# Altium PCB BioTemp_pci.PcbDoc
Units mm, origin at the board's own origin, x right, y up, seen from the top; angles counter-clockwise.
Board outline 68.45 x 74.17 mm, 2 copper layers (Top Layer, Bottom Layer); 20 components, 19 nets, 90 pads, 4 vias.
Unrouted connection lines stored in the file: 11.
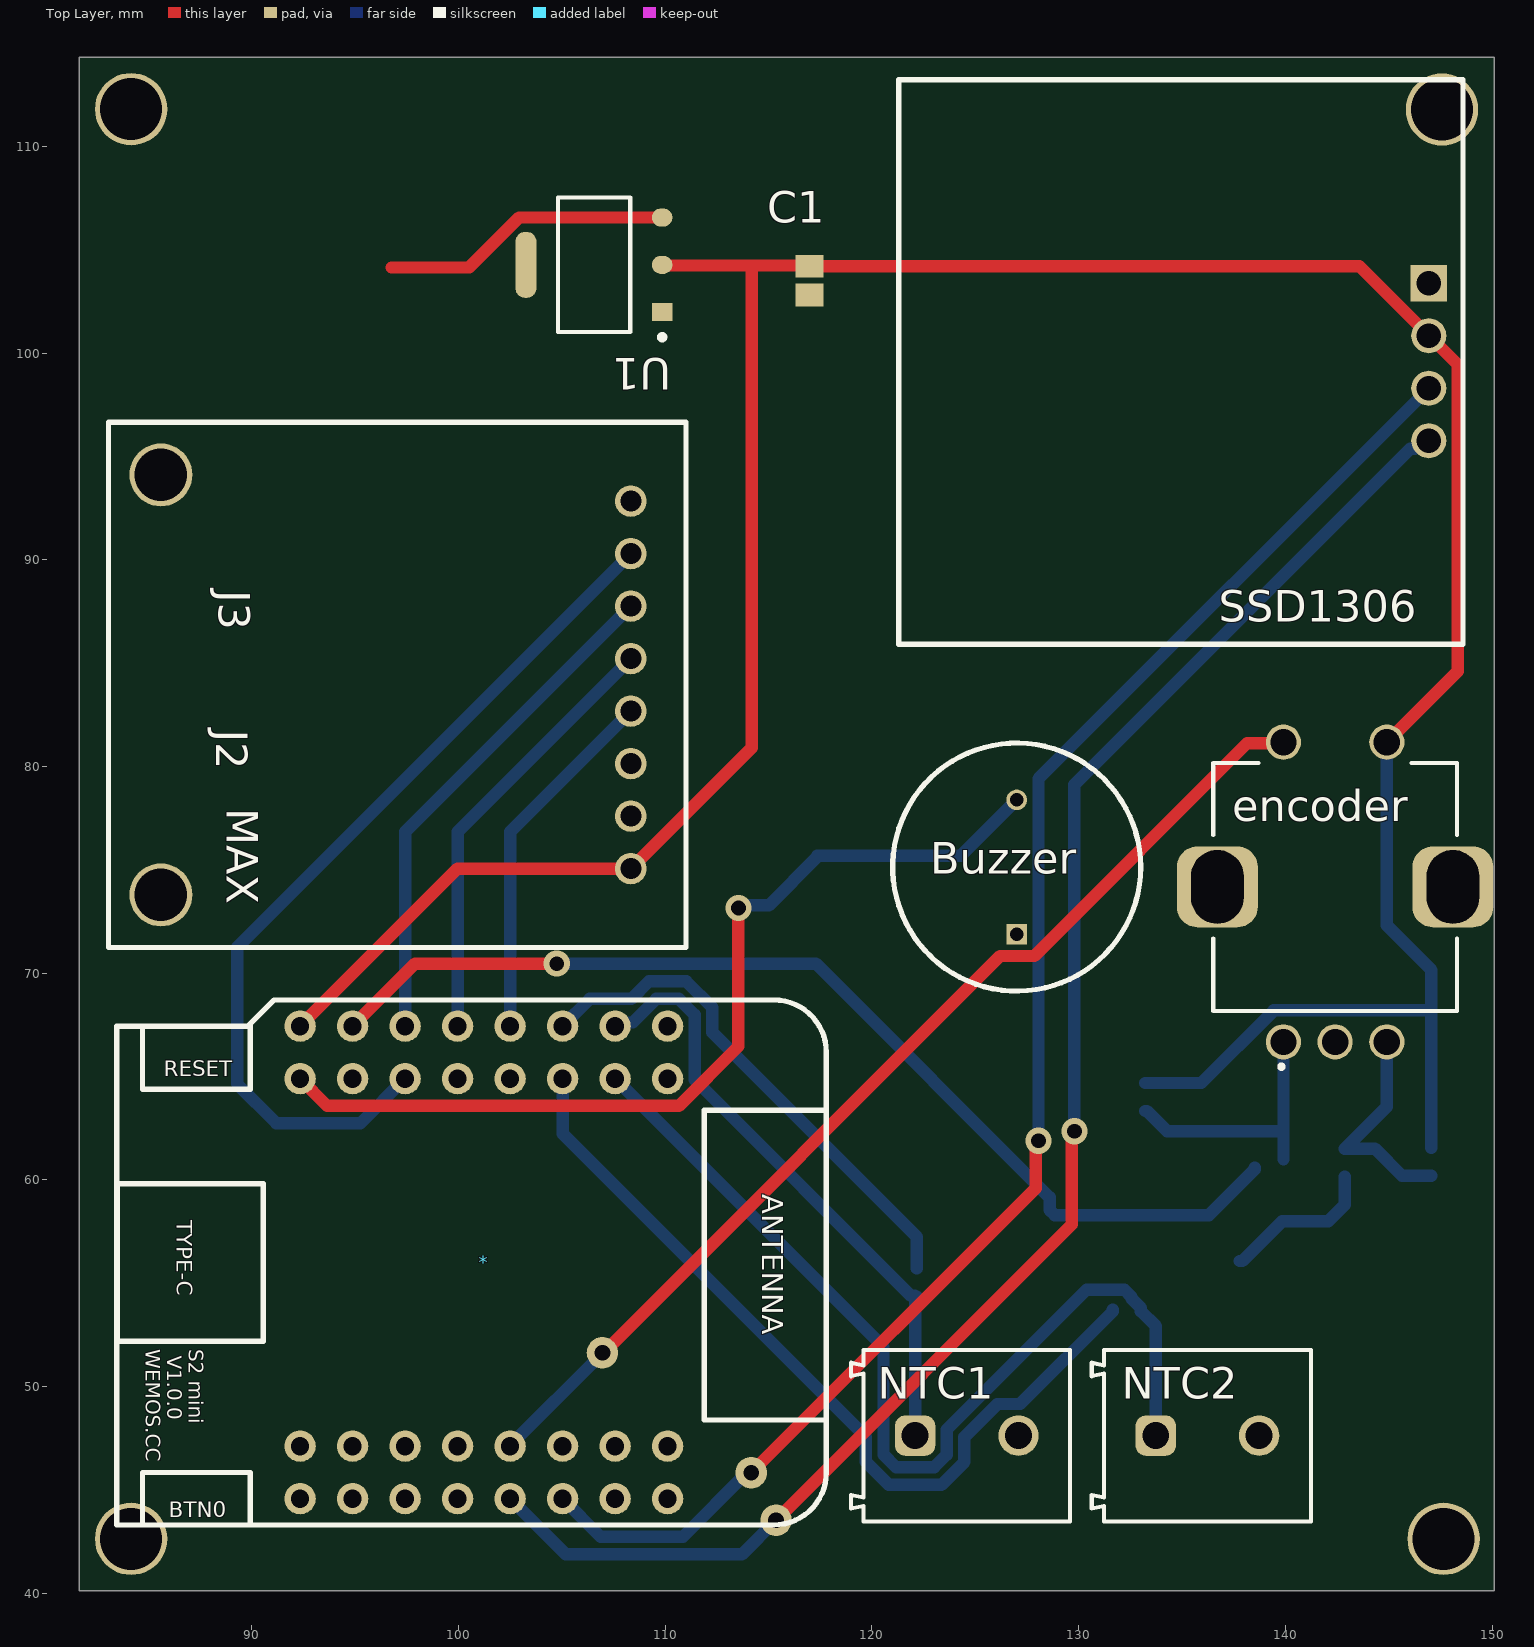
[diagram p0: Top Layer view]
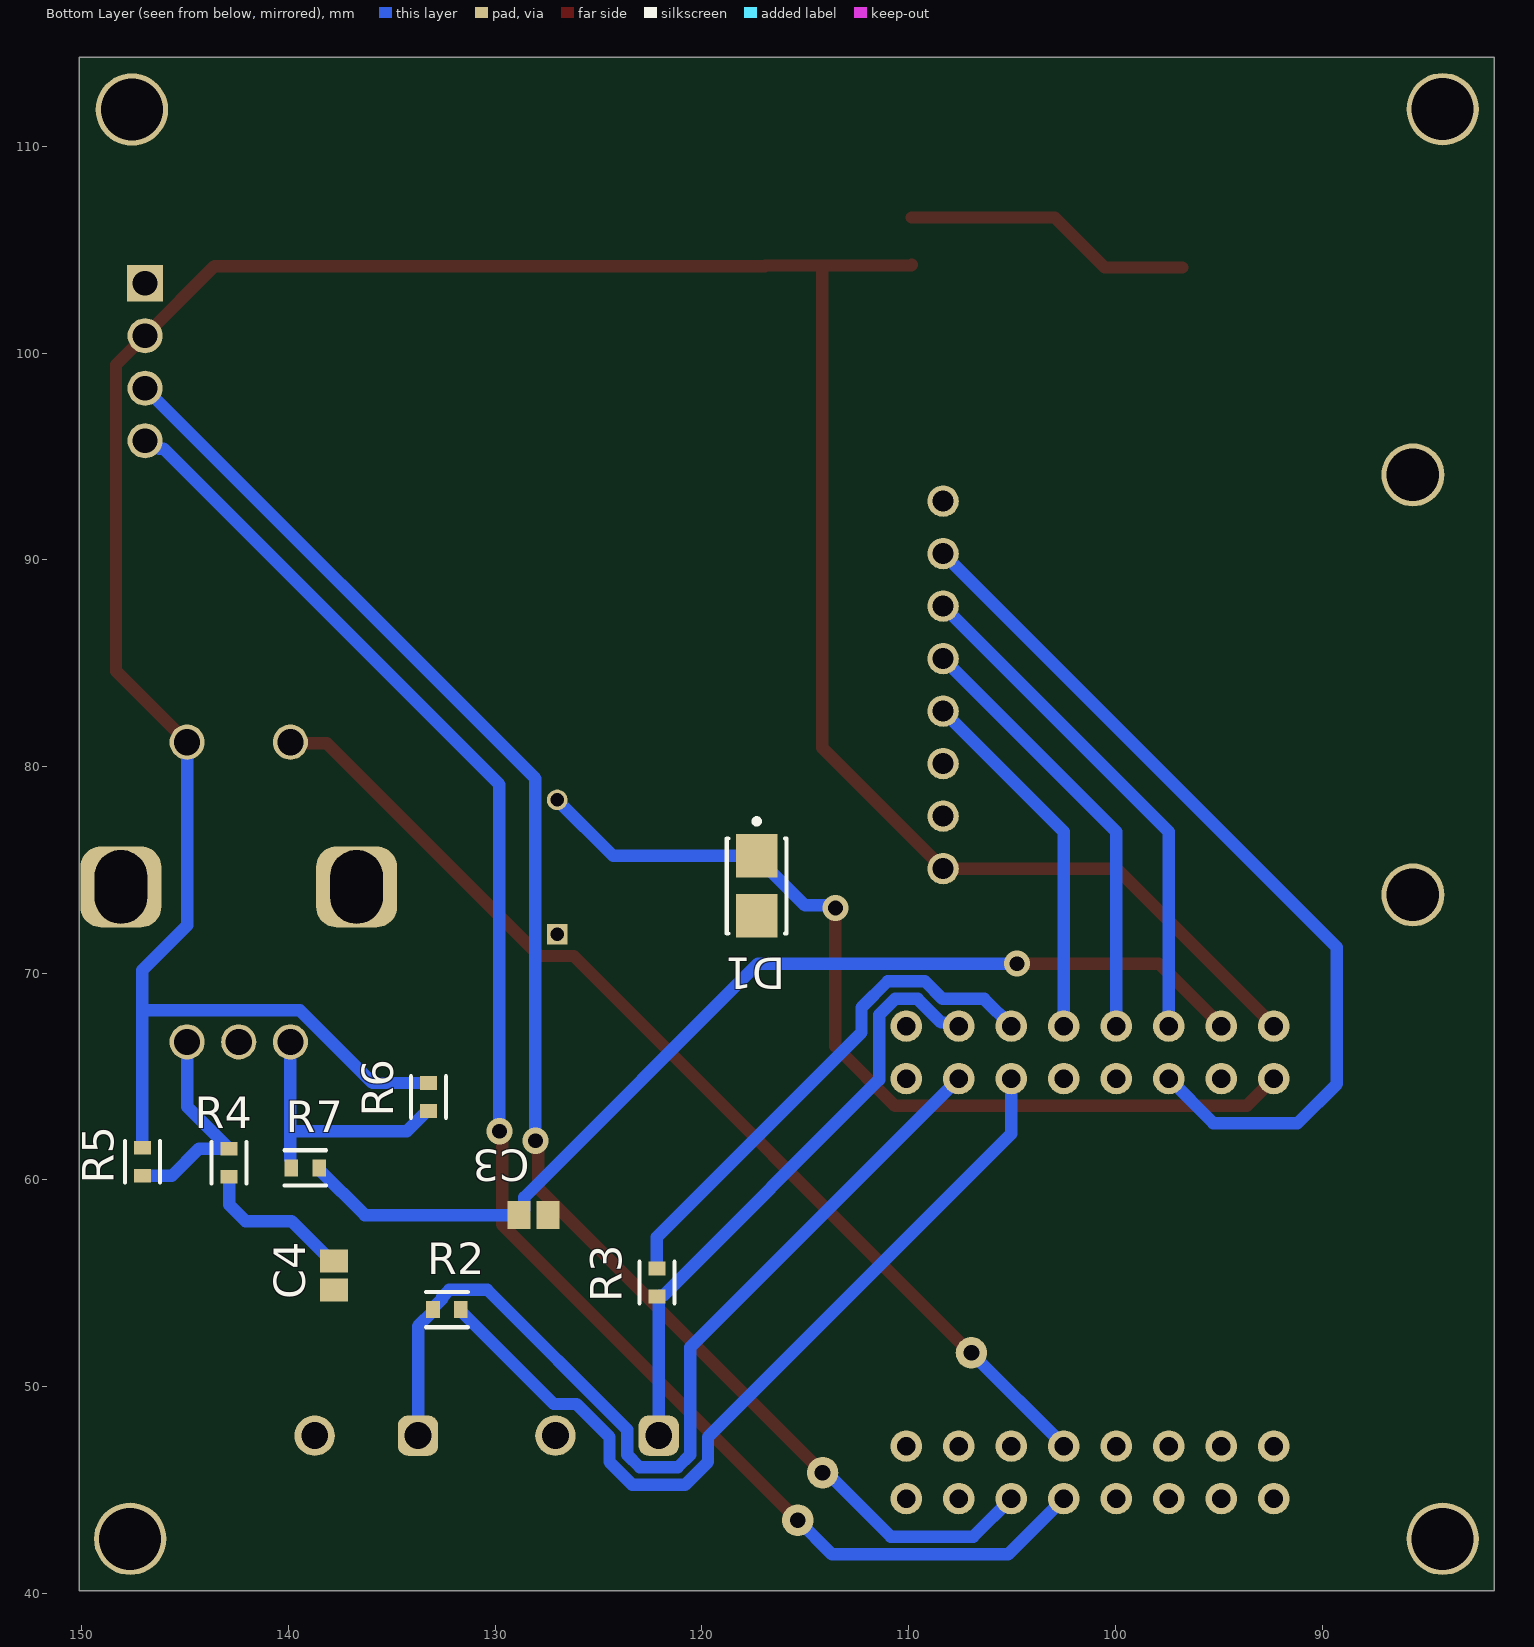
[diagram p1: Bottom Layer view, seen from below]
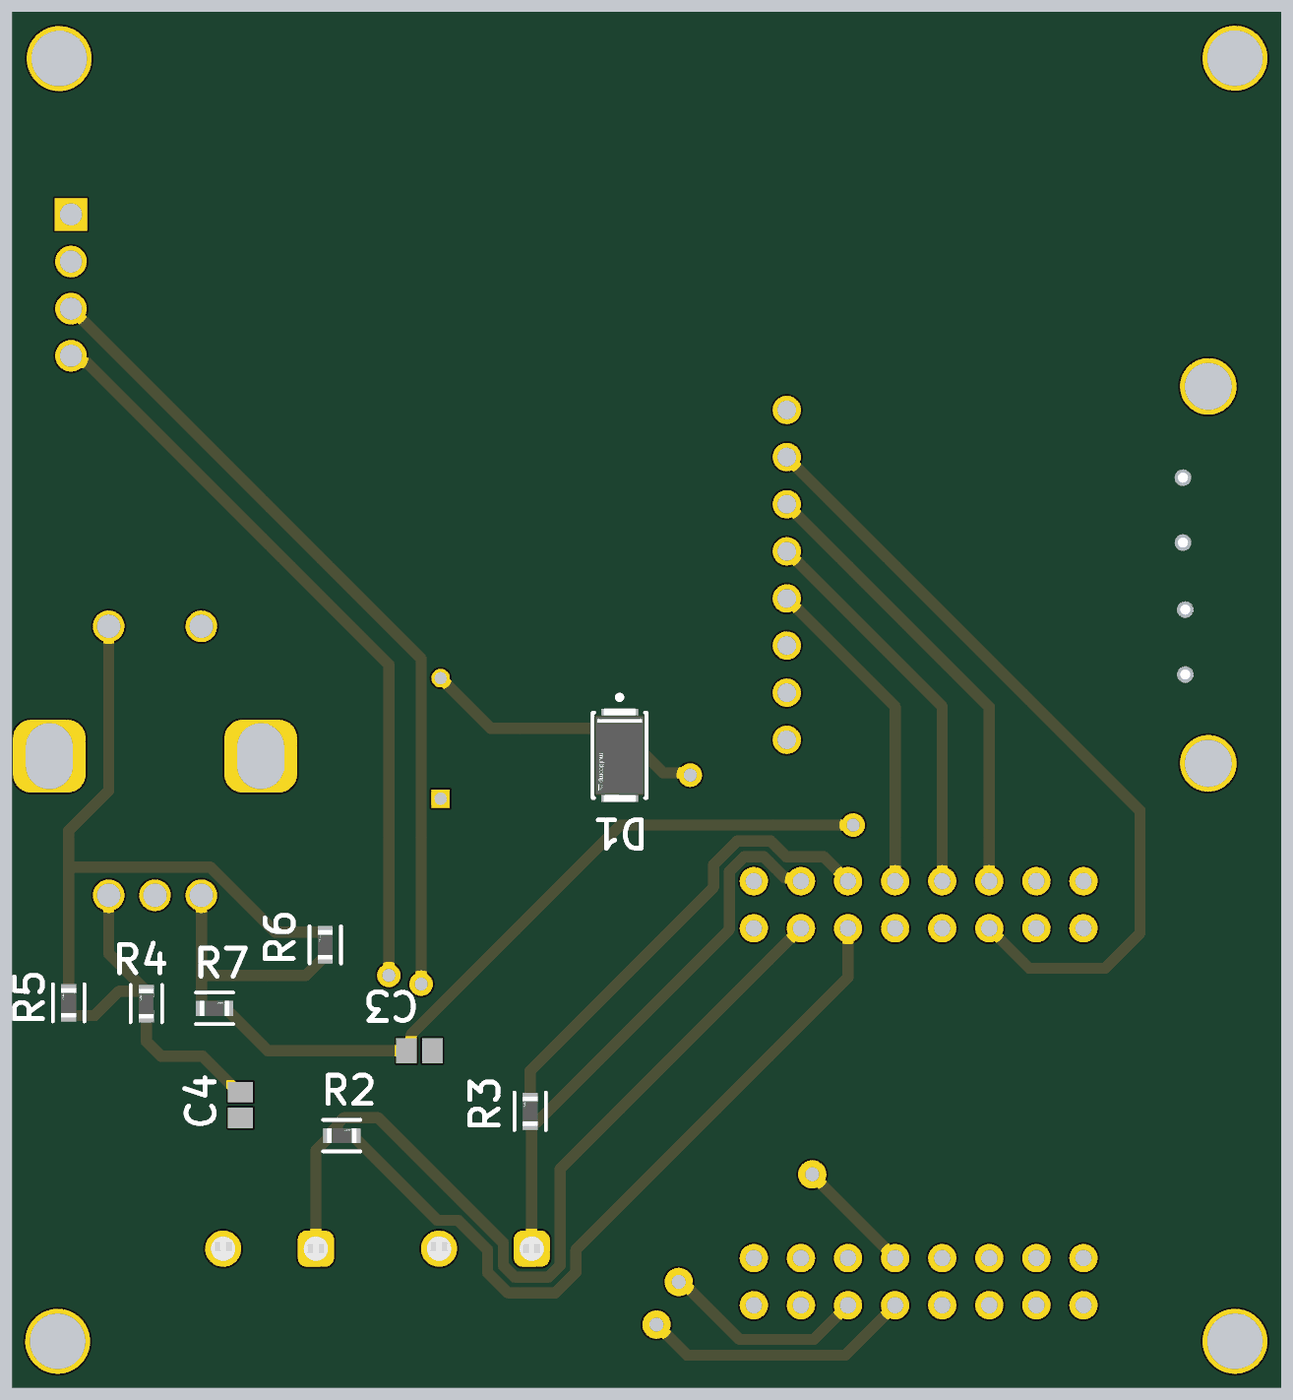
[diagram p2: 3D render of the assembled board from below, using the file's embedded part models]

## Layer stack, top to bottom
Top Solder: solder mask 0.0102, Solder Resist, Dk 3.5
Top Layer: signal copper 0.0356
Dielectric 1: dielectric 0.32, FR-4, Dk 4.8
Bottom Layer: signal copper 0.0356
Bottom Solder: solder mask 0.0102, Solder Resist, Dk 3.5

## Board outline
81.661,40.132 81.661,114.3 150.114,114.3 150.114,40.132

## Design rules (kind name [scope] priority, off if disabled: settings)
Clearance [All] p1: gap=0.254 ignorepadtopadclearanceinfootprint=FALSE except(0: Arc-Hole Track-Hole SMDPad-Hole THPad-Hole Via-Hole Fill-Hole Poly-Hole Region-Hole Text-Hole)
PolygonConnect [All] p1: connectstyle=Relief reliefconductorwidth=0.254 reliefentries=4 polygonreliefangle="90 Angle" airgapwidth=0.254
RoutingVias [All] p1: holewidth=0.711 width=1.27 viastyle="Through Hole" minholewidth=0.711 minwidth=1.27 maxholewidth=0.711 maxwidth=1.27
SolderMaskExpansion [All] p1: expansion=0.102 istentingtop=FALSE
Width [All] p1: maxlimit=0.8 minlimit=0.254 preferedwidth=0.6 minimp=50.000000 maximp=50.000000 favimp=50.000000
30 further rules are at their usual default settings.

## Components (designator, comment, footprint, x,y, rotation, side; value= is the part's Value field where it differs from the comment)
* "Component_1" "WEMOS ESP32 S2 Mini" 87.651,73.66 r270 top
Buzzer "WT1205" WT1205 132.003,69.882 r90 top (schematic designator "Buzzer WT1205")
C1 "C0805C103K5RACTU" CAPC2013X88X50LL20T25 116.97,103.505 r90 top
C3 "C0805C103K5RACTU" CAPC2013X88X50LL20T25 128.146,58.293 r0 bottom
C4 "C0805C103K5RACTU" CAPC2013X88X50LL20T25 137.798,55.372 r90 bottom
D1 "1N4007 SMD" FP-1N4007_SMD-IPC_C 117.351,74.221 r270 bottom
encoder "PEC11H-4020F-S0016" PEC11H4020FS0016 142.41,66.675 r0 top (schematic designator B2)
J2 "1776275-2" TE_1776275-2 86.868,80.264 r270 top
J3 "1776275-2" TE_1776275-2 86.995,87.376 r270 top
MAX "max31865" max31865 111.001,71.247 r90 top
NTC1 "691213710002" 691213710002 124.59,47.625 r0 top
NTC2 "691213710002" 691213710002 136.234,47.625 r0 top
R2 "RC0603FR-0710KL" FP-RC0603-0_55-IPC_C 132.337,53.721 r180 bottom
R3 "RC0603FR-0710KL" FP-RC0603-0_55-IPC_C 122.177,55.033 r90 bottom
R4 "RC0603FR-0710KL" FP-RC0603-0_55-IPC_C 142.878,60.833 r90 bottom
R5 "RC0603FR-0710KL" FP-RC0603-0_55-IPC_C 147.069,60.875 r90 bottom
R6 "RC0603FR-0710KL" FP-RC0603-0_55-IPC_C 133.226,64.008 r90 bottom
R7 "RC0603FR-0710KL" FP-RC0603-0_55-IPC_C 139.195,60.579 r180 bottom
SSD1306 "SSD1306" SSD1306 146.942,113.218 r180 top
U1 "AMS1117-3.3" FP-AMS1117-IPC_C 106.556,104.267 r180 top

## Footprints (in the part's own frame and the unit in brackets; to place one, negate y for a bottom-side part, rotate by r counter-clockwise, add the part's x,y. Pads: shape width x height; smd on the part's side, far side on the other; paste and mask are expansions set on the pad)
691213710002 [mm] "5,00mm - modular - green - Horizontal entry with rising cage clamp -  10,0mm height - 02p"
  rrect50% 1.95x1.95 hole 1.3: 1(-2.5,0)
  round 1.95 hole 1.3: 2(2.5,0)
  silkscreen extent -5.6,-4.15 5,4.15, body extent -5.6,-4.15 5,4.15, height 10.05
CAPC2013X88X50LL20T25 [mm] "Chip Capacitor, 2-Leads, Body 2.00x1.25mm, IPC High Density"
  rect 1.1x1.35 smd: 1(-0.7,0) 2(0.7,0)
  body extent -1.1,-0.72 1.1,0.72, height 0.88
FP-1N4007_SMD-IPC_C [mm]
  rect 2.1x2 smd paste+0 mask+0: 1(-1.45,0) 2(1.45,0)
  silkscreen extent -3.25,-1.45 2.3,1.45, body extent -2.52,-1.35 2.52,1.35, height 2.62
FP-AMS1117-IPC_C [mm]
  rect 1.004x0.872 smd paste+0 mask+0: 1(-3.295,2.29)
  rrect100% 1.004x0.872 smd paste+0 mask+0: 2(-3.295,0) 3(-3.295,-2.29)
  rrect87% 1.004x3.182 smd paste+0 mask+0: 4(3.295,0)
  silkscreen extent -3.42,-3.25 1.75,3.62, body extent -3.9,-3.35 3.9,3.35, height 0.25
FP-RC0603-0_55-IPC_C [mm]
  rect 0.659x0.812 smd paste+0 mask+0: 1(-0.677,0) 2(0.677,0)
  silkscreen extent -1.01,-0.85 1.01,0.85, body extent -0.8,-0.4 0.8,0.4, height 0.55
max31865 [mil] "Adafriut max31865 RTD amplifier"
  round 60 hole 40: 1(150,105) 2(250,105) 3(350,105) 4(450,105) 5(550,105) 6(650,105) 7(750,105) 8(850,105)
  round 120 hole 100: 18(100,1000) 19(900,1000)
  silkscreen extent 0,0 1000,1100
PEC11H4020FS0016 [mm]
  round 1.702 hole 1.27: A1(-2.5,0) B1(2.5,0) C1(0,0) S1(-2.5,14.5) W1(2.5,14.5)
  rrect50% 3.915x3.915 hole 2.54 slot 3.556 at 90 deg: MH1(-5.7,7.5) MH2(5.7,7.5)
  silkscreen extent -5.9,-1.3 5.9,13.5
SSD1306 [mm]
  rect 1.75x1.75 hole 1.2: 0(0,9.84)
  round 1.7 hole 1.2: 1(0,12.38) 2(0,14.92) 3(0,17.46)
  silkscreen extent -1.65,0 25.65,27.3
TE_1776275-2 [mm]
  body extent -4.06,-3.63 3.94,3.37, height 8.3
"WEMOS ESP32 S2 Mini" [mil]
  round 60 hole 35 paste+0 mask+4: 1(245,884.3) 2(345,884.3) 3(245,784.3) 4(345,784.3) 5(245,684.3) 6(345,684.3) 7(245,584.3) 8(345,584.3) 9(245,484.3) 10(345,484.3) 11(245,384.3) 12(345,384.3) 13(245,284.3) 14(345,284.3) 15(245,184.3) 16(345,184.3) 17(1045,184.3) 18(1145,184.3) 19(1045,284.3) 20(1145,284.3) 21(1045,384.3) 22(1145,384.3) 23(1045,484.3) 24(1145,484.3) 25(1045,584.3) 26(1145,584.3) 27(1045,684.3) 28(1145,684.3) 29(1045,784.3) 30(1145,784.3) 31(1045,884.3) 32(1145,884.3)
  silkscreen extent 195,-165 1195,1187
WT1205 [mm] "Buzzer WT1205"
  round 1 hole 0.65: 1(8.5,5)
  rect 1x1 hole 0.65: 2(2,5)
  silkscreen extent -0.75,-1 11.25,11, body extent -0.76,-1 11.25,11, height 9.5

## Part data
Buzzer: "Buzzer WT1205 87dB 5V"
C1 C3 C4: library part CMP-2007-00266-1, Manufacturer=Kemet, Part Number=C0805C103K5RACTU
D1: library part CMP-12389-000001-1, "Rectifier, 1Kv, 1A, Do-214Ac Rohs Compliant: Yes"
encoder: "Encoders ROTARY ENCODER W/BALL SPRING", Manufacturer_Name=Bourns, Mouser Part Number=652-PEC11H4020FS0016, Datasheet Link=https://componentsearchengine.com/Datasheets/2/PEC11H-4020F-S0016.pdf, Geometry.Height=27mm, Manufacturer_Part_Number=PEC11H-4020F-S0016, Mouser Price/Stock=https://www.mouser.co.uk/ProductDetail/Bourns/PEC11H-4020F-S0016?qs=7MVldsJ5Uaz%252B8OdHRKxgZA%3D%3D
J2 J3: "2 Position Wire to Board Terminal Block Horizontal with Board 0.138\" (3.50mm) Through Hole", Package=None, Availability=Unavailable, Check_prices=https://www.snapeda.com/parts/1776275-2/TE+Connectivity+AMP+Connectors/view-part/?ref=eda, MF="TE Connectivity", MP=1776275-2, Price=None, SnapEDA_Link=https://www.snapeda.com/parts/1776275-2/TE+Connectivity+AMP+Connectors/view-part/?ref=snap
NTC1 NTC2: library part CMP-1502-02526-2, Color=Green, Current=10A, Max Operating Temperature=105°C, Min Operating Temperature=-40°C, Voltage=300V, Contact Material=Brass, Contact Plating=Tin, Current Rating=10A, Height=10mm, Housing Material=Nylon, Lead Pitch=5mm, Length=8.3mm, Mount="Through Hole", NexarPartId=8917718, Number of Contacts=2, Number of Levels=1, Number of Pins=2, Number of Positions Per Level=2, Packaging=Box, Pitch=5.0038mm, Plating="Brass, Steel", REACH SVHC=Unknown, RoHS=Compliant, Stripping Length=-7mm, Termination=Screw, Voltage Rating=300V, Width=10.6mm, Wire Gauge (Max)=26AWG, Wire Gauge (Min)=16AWG, Wire/Cable Gauge=26AWG
R2 R3 R4 R5 R6 R7: library part CMP-2100-03664-2, "RES 10K OHM 1% 1/10W 0603", Case Code (Imperial)=0603, Case Code (Metric)=1608, Max Operating Temperature=155°C, Max Power Dissipation=100mW, Min Operating Temperature=-55°C, Resistance=10kR, Resistance Tolerance=1%, Resistor Type="Thick Film", Temperature Coefficient=100ppm/°C, Voltage Rating=75V, Voltage Rating (DC)=50V, Case/Package=0603, Construction=Rectangular, Depth=0.8mm, Features="Moisture Resistant", Height=0.45mm, Lead Free="Lead Free", Lead Pitch=0.3mm, Length=1.6mm, Military Standard=Not, Number of Pins=2, Number of Terminations=2, Packaging="Tape and Reel", Power Rating=100mW, RoHS Compliant=Yes, Series=RC, Size Code=0603, Termination=SMD/SMT, Tolerance=1%, Weight=7.1E-05oz, Width=0.8mm
SSD1306: "SSD1306 OLED Display 1280x64"
U1: library part CMP-209535-000001-1, "LDO Voltage Regulators 1A, 3.3V", Dropout Voltage=1.1V, Manufacturer="Advanced Monolithic Systems", Max Junction Temp=+125°C, Max Power Dissipation=1.2W, Max Supply Voltage=15V, Nominal Supply Current=5mA, Output Current=1A, Output Voltage=3.3V, Package=AMS1117, Temperature="-40°C to +125°C", Temperature Range Low=-40°C, Automotive=No, Category=IC, ComponentLink2Description=Datasheet, ComponentLink2URL=http://www.advanced-monolithic.com/pdf/ds1117.pdf, Device Class L1="Integrated Circuits (ICs)", Device Class L2="Power Management ICs", Device Class L3="Voltage Regulators - Linear", Height=1.8mm, Ipc Land Pattern Name=SOT229P700X180-4, Lead Free=Yes, Manufacturer Part Number=AMS1117-3.3, Number Of Outputs=1, Octopart=https://octopart.com/ams1117-3.3-advanced+monolithic+systems-25899300, Output Type=Fixed, RoHS=TRUE, Standoff Height=0.64mm, Temperature Range High=+125°C

## Free pads (board coordinates)
  round 3.5 hole 3: 2(84.16,111.8) 2(84.161,42.632) 2(147.579,111.781) 2(147.661,42.632)
  round 1.524 hole 0.762: 3(106.961,51.632) 4(114.161,45.832) 5(115.361,43.532)

## Via types
v1: diameter 1.27, hole 0.711, Top Layer to Bottom Layer, 4 vias

## Nets (pads, with @x,y where several pads share a name; then routed paths per layer and width w, separated by ;. In a path a pad name is that pad's centre, name@x,y a point inside that pad or via, vN(x,y) a via of type N, cw(c..) or ccw(c..) an arc to the next point about the centre after c; other vN are vias at no path point)
ADC1: *.3 NTC1.1 R3.1 | length 29.7
  Bottom Layer w0.6: *.3 107.749,67.614 108.428,67.614 109.567,68.753 110.657,68.753 111.428,67.982 111.428,64.85 121.893,54.385 122.071,54.385 122.1,54.356 R3.1 ; NTC1.1 122.09,54.327 R3.1@122.119,54.356
ADC2: *.4 NTC2.1 R2.1 | length 47.4
  Bottom Layer w0.6: *.4 120.561,51.908 120.561,46.706 121.171,46.096 123.009,46.096 123.619,46.706 123.619,47.914 130.386,54.681 132.219,54.681 132.56,54.34 132.56,54.251 133.014,53.798 R2.1 133.014,53.644 133.734,52.924 NTC2.1
Buzzer: *.16 Buzzer.1 D1.1 | length 45.3
  Top Layer w0.6: *.16 93.648,63.581 110.657,63.581 113.541,66.465 v1(113.541,73.152)
  Bottom Layer w0.6: v1(113.541,73.152) 113.669,73.28 115.01,73.28 117.351,75.621 D1.1 124.292,75.671 Buzzer.1
CLK: *.13 C3.2 R7.2 | length 51.3
  Top Layer w0.6: *.13 97.896,70.461 v1(104.754,70.461)
  Bottom Layer w0.6: v1(104.754,70.461) 117.286,70.461 128.596,59.151 128.596,58.543 C3.2 136.309,58.293 138.518,60.502 R7.2
CS: *.12 MAX.7 | length 43.4
  Bottom Layer w0.6: *.12 95.253,62.738 91.189,62.738 89.284,64.643 89.284,71.247 MAX.7
DT: C4.2 R4.1 | length 7.6
  Bottom Layer w0.6: C4.2 137.923,56.072 139.857,58.006 142.083,58.006 142.878,58.801 R4.1
GND: *.19 Buzzer.2 C1.1 C3.1 C4.1 D1.2 encoder.C1 MAX.2 NTC1.2 NTC2.2 SSD1306.0 U1.1
MISO: *.9 MAX.5 | length 21.3
  Bottom Layer w0.6: *.9 99.952,76.835 MAX.5
MOSI: *.11 MAX.6 | length 24.8
  Bottom Layer w0.6: *.11 97.412,76.835 MAX.6
NetB2_A1: encoder.A1 R6.1 R7.1 | length 12.8
  Bottom Layer w0.6: R6.1 133.303,63.331 134.277,62.357 139.91,62.357 ; 139.91,61.003 139.91,62.357 ; encoder.A1 139.91,62.357
NetB2_B1: encoder.B1 R4.2 R5.1 | length 10.7
  Bottom Layer w0.6: encoder.B1 144.91,63.542 R4.2 144.332,61.51 145.644,60.198 R5.1
NetJ1_1: U1.3 | length 14.1
  Top Layer w0.6: 96.754,104.14 100.513,104.14 102.93,106.557 U1.3
NTC1: *.5 R3.2 | length 25.4
  Bottom Layer w0.6: *.5 106.348,68.753 108.359,68.753 109.213,69.607 111.011,69.607 112.282,68.336 112.282,67.128 122.177,57.233 R3.2
NTC2: *.6 R2.2 | length 41.3
  Bottom Layer w0.6: *.6 105.032,62.235 119.707,47.56 119.707,46.352 120.817,45.242 123.362,45.242 124.473,46.352 124.473,47.56 126.067,49.154 127.17,49.154 131.66,53.644 R2.2
SCK: *.7 MAX.4 | length 17.7
  Bottom Layer w0.6: *.7 102.492,76.835 MAX.4
SCL: *.28 pad.4 SSD1306.2 | length 77.2
  Top Layer w0.6: pad.4 127.929,59.6 127.929,61.759 v1(128.057,61.887)
  Bottom Layer w0.6: *.28 106.877,42.732 110.861,42.732 113.961,45.832 pad.4 ; v1(128.057,61.887) 128.057,79.413 SSD1306.2
SDA: *.26 pad.5 SSD1306.3 | length 80.4
  Top Layer w0.6: pad.5@115.277,43.448 129.669,57.84 129.669,62.229 v1(129.797,62.357)
  Bottom Layer w0.6: *.26 105.191,41.878 113.707,41.878 pad.5 ; v1@129.797,62.401 129.797,79.121 146.05,95.375 146.261,95.375 146.644,95.758 SSD1306.3
SW: *.25 encoder.S1 pad.3 | length 51.6
  Top Layer w0.6: pad.3 107.007,51.632 126.203,70.828 127.859,70.828 138.159,81.128 139.863,81.128 encoder.S1
  Bottom Layer w0.6: *.25 102.492,47.14 106.961,51.609 pad.3
Vcc: *.15 C1.2 encoder.W1 MAX.1 R5.2 R6.2 SSD1306.1 U1.2 | length 146.8
  Top Layer w0.6: *.15 99.952,75.057 MAX.1 114.176,80.899 114.176,104.236 ; U1.2 109.882,104.236 114.176,104.236 ; encoder.W1 148.346,84.611 148.346,99.434 SSD1306.1 143.575,104.205 C1.2 116.939,104.236 114.176,104.236
  Bottom Layer w0.6: R6.2 135.933,64.685 139.447,68.199 147.069,68.199 ; encoder.W1 144.91,72.308 147.069,70.149 147.069,68.199 ; R5.2 147.069,68.199
pads on no net: *.1 *.2 *.8 *.10 *.14 *.17 *.18 *.20 *.21 *.22 *.23 *.24 *.27 *.29 *.30 *.31 *.32 encoder.MH1 encoder.MH2 MAX.3 MAX.8 MAX.18 MAX.19 U1.4

## Silkscreen, mask and mechanical layers (free items; w line width, h text height)
Top Solder:
  the board outline again, w0.254

## Text inside footprints (layer, text, board x,y; h text height)
*: Top Overlay "S2 mini /  V1.0.0 / WEMOS.CC" at 84.857,51.816 h0.7 r270; Top Overlay "ANTENNA" at 114.684,59.309 h1.02 r270; Top Overlay "TYPE-C" at 86.363,58.039 h0.76 r270; Top Overlay "RESET" at 85.728,65.024 h0.76; Top Overlay "BTN0" at 85.982,43.688 h0.76